# Altium PCB LEDMatrix.PcbDoc
Units mil, origin at the board's own origin, x right, y up, seen from the top; angles counter-clockwise.
Board outline 4925 x 2700 mil, 2 copper layers (Top Layer, Bottom Layer); 167 components, 176 nets, 355 pads, 150 vias.
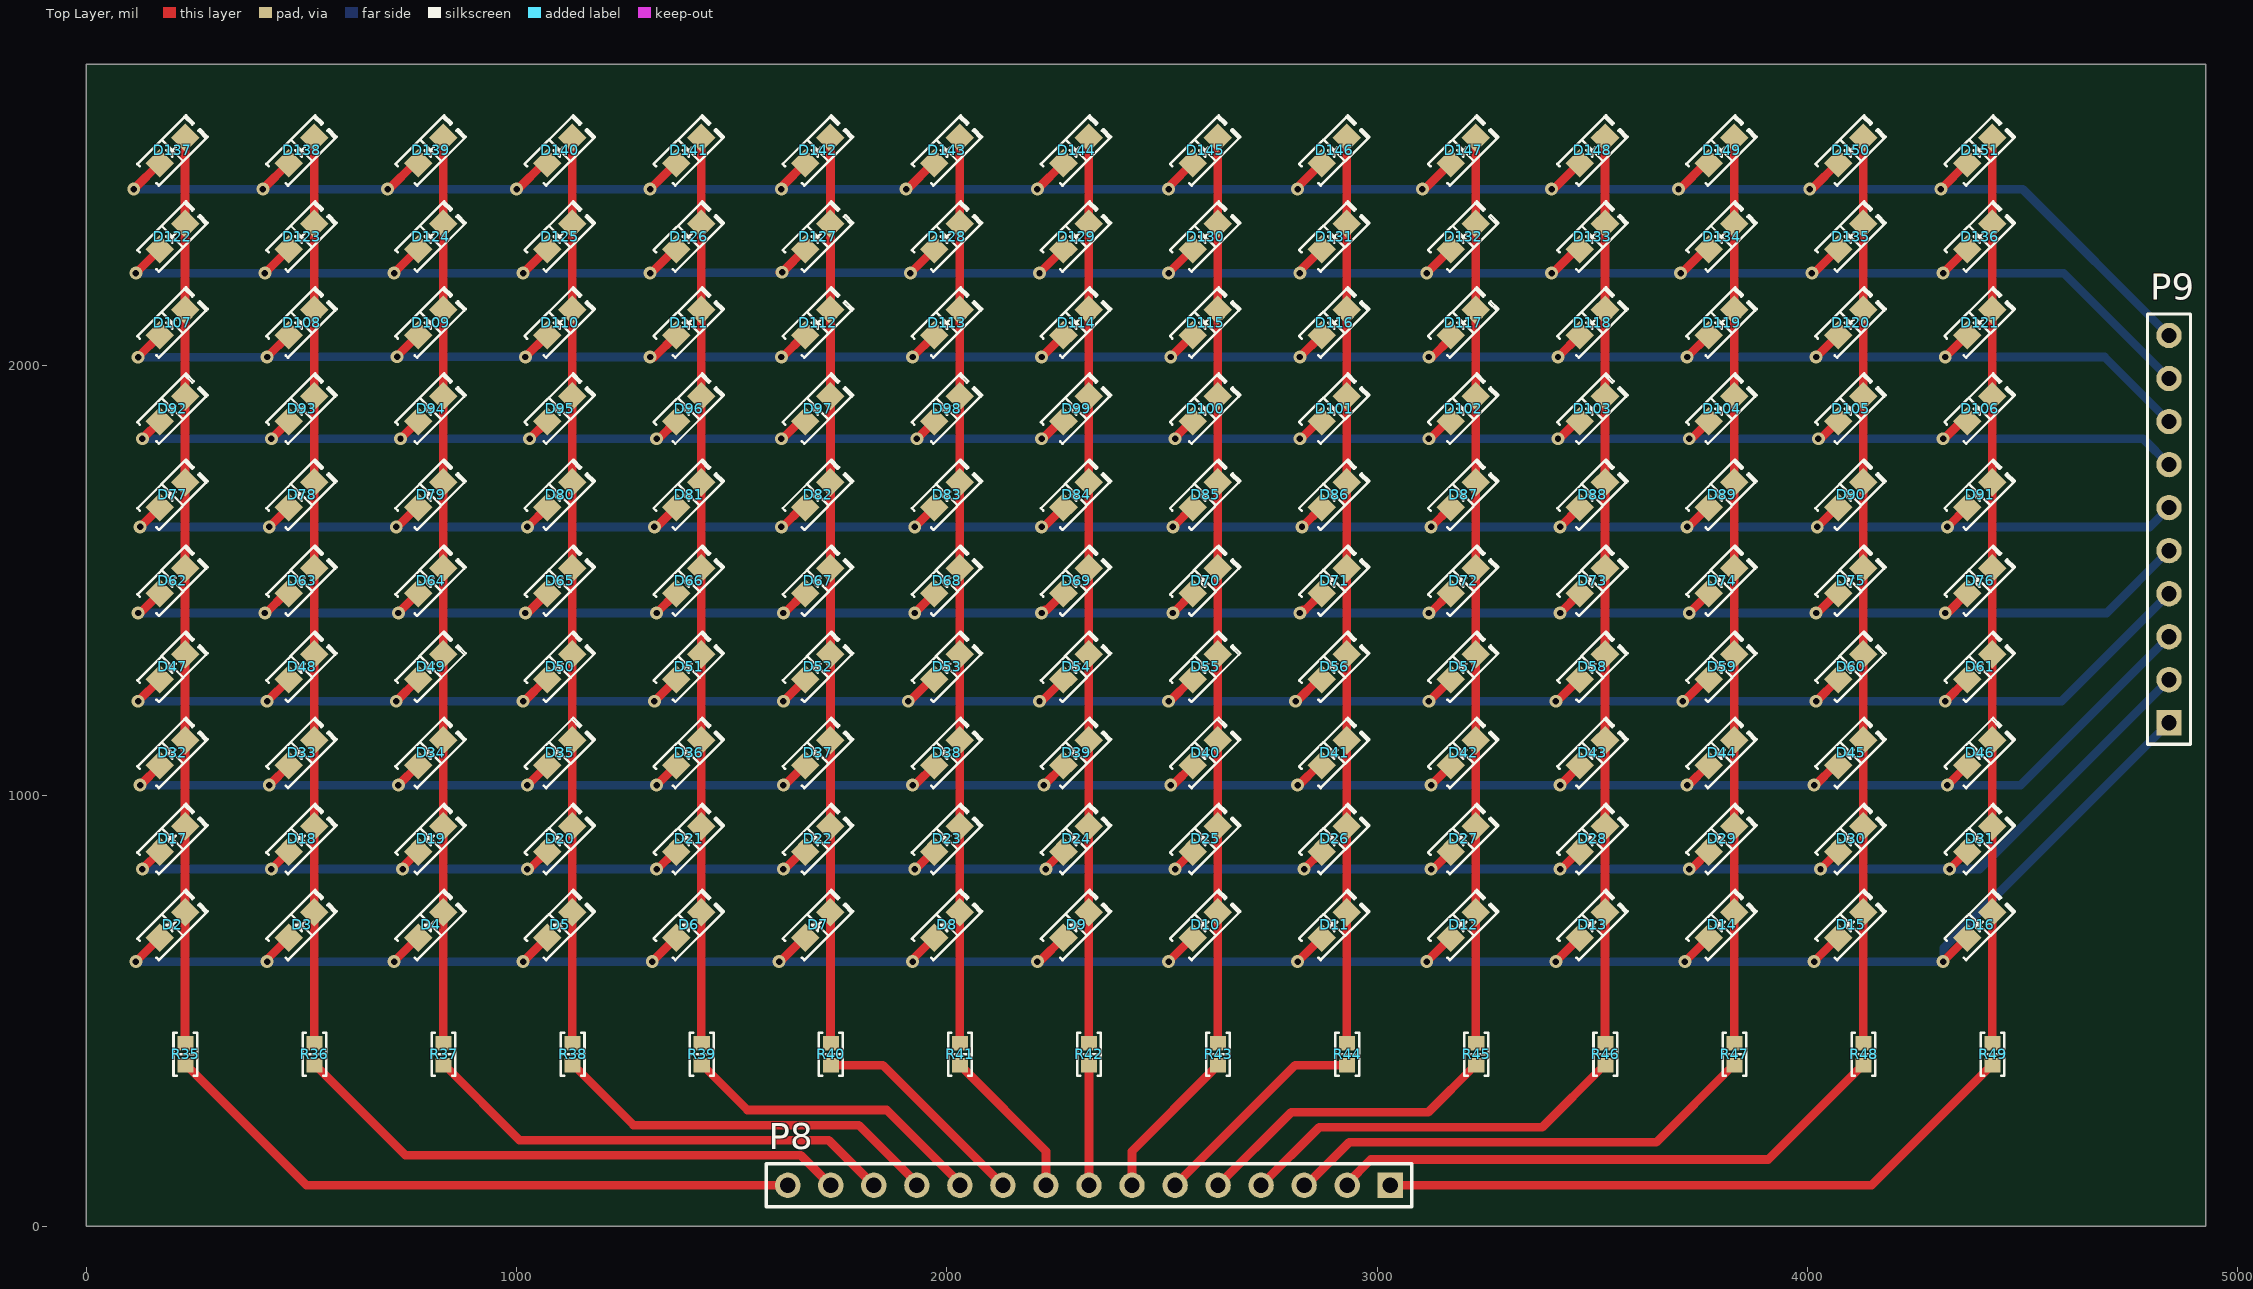
[diagram p0: Top Layer view]
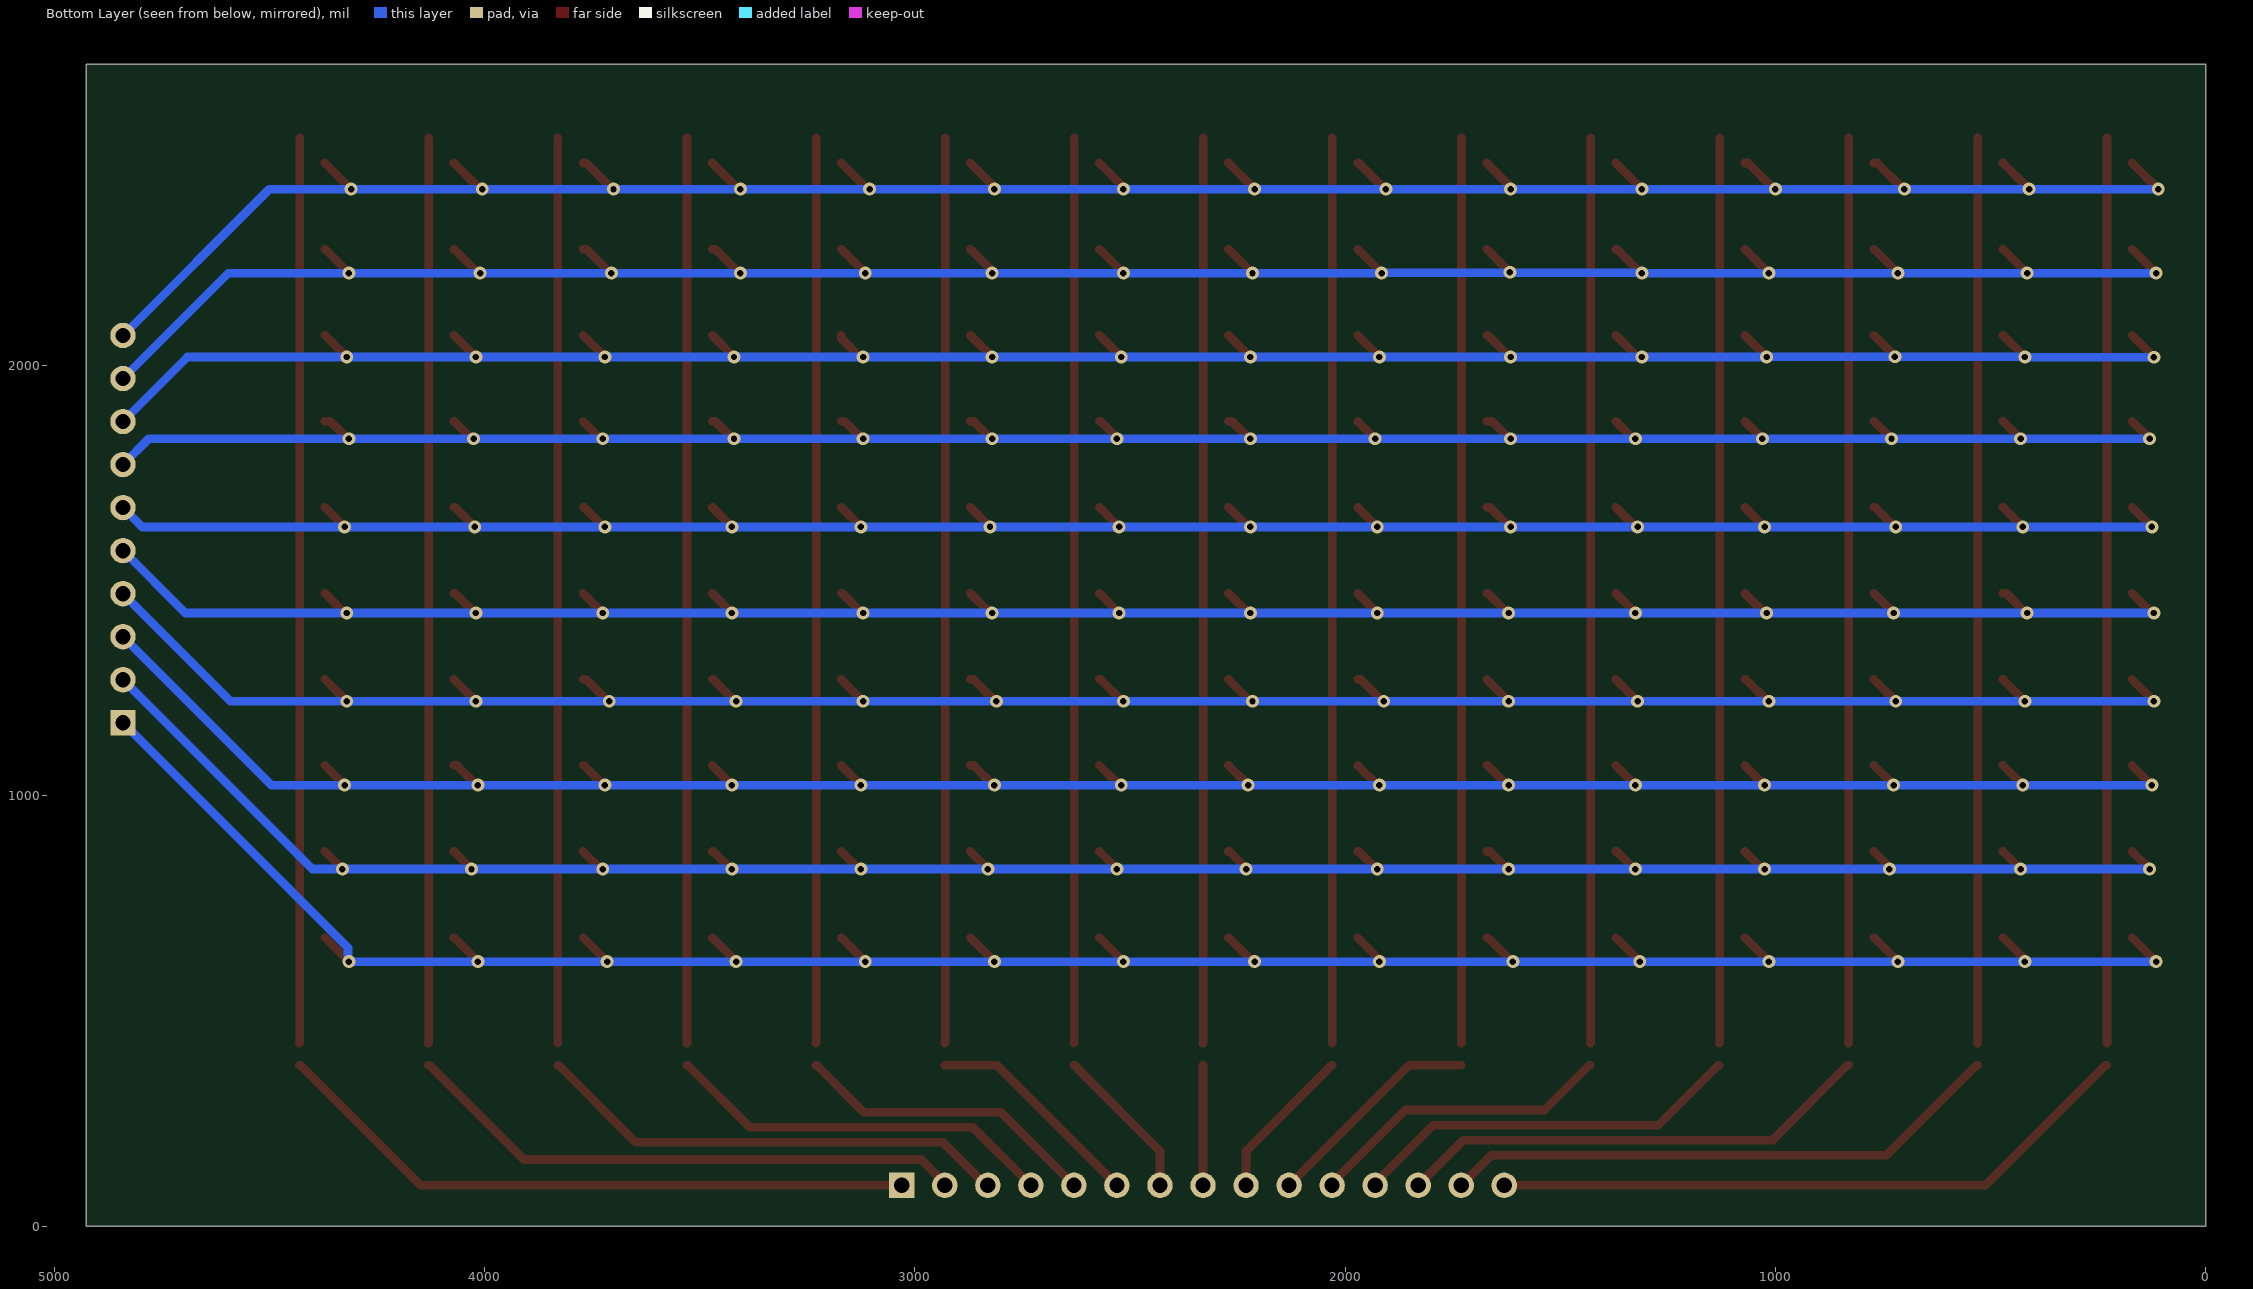
[diagram p1: Bottom Layer view, seen from below]
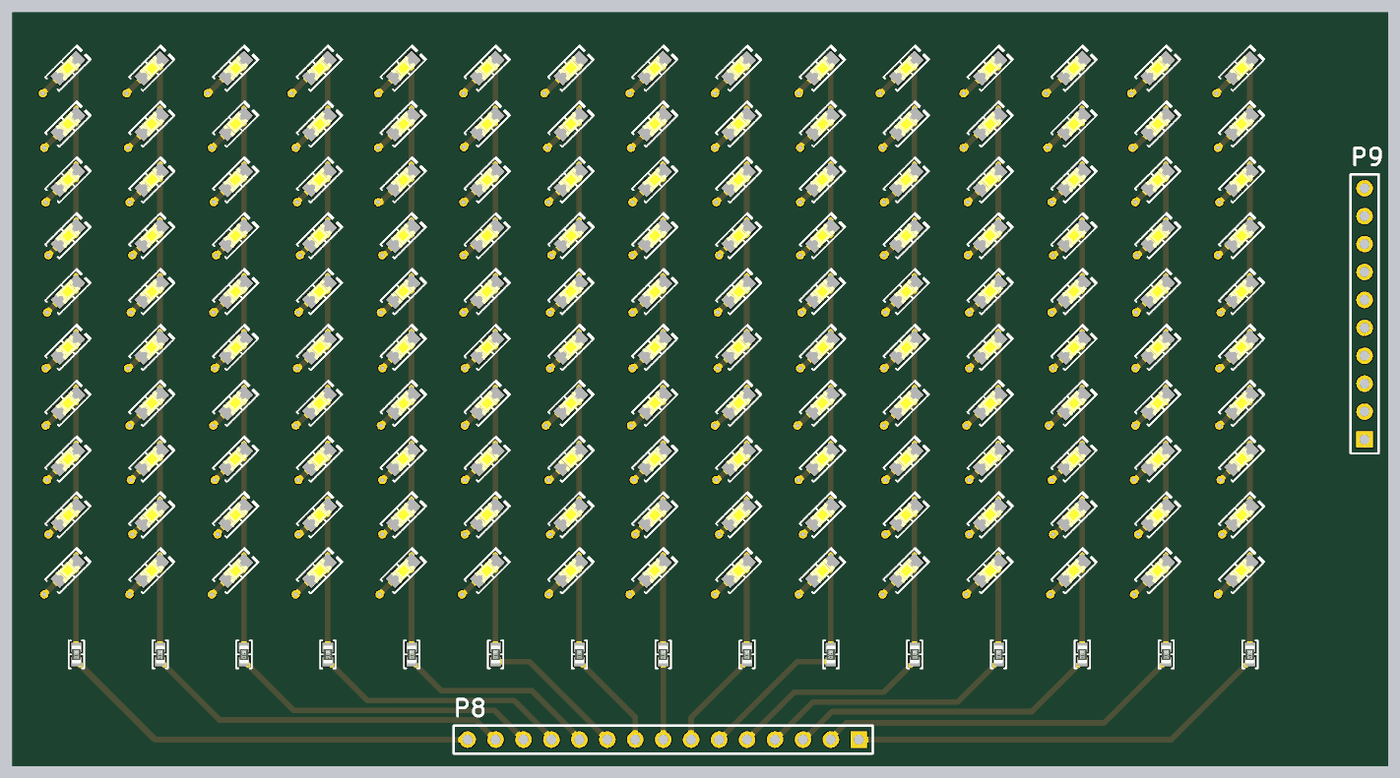
[diagram p2: 3D render of the assembled board from above, using the file's embedded part models]

## Layer stack, top to bottom
Top Solder: solder mask 0.4, Solder Resist, Dk 3.5
Top Layer: signal copper 1.4
Dielectric 1: dielectric 12.6, FR-4, Dk 4.8
Bottom Layer: signal copper 1.4
Bottom Solder: solder mask 0.4, Solder Resist, Dk 3.5

## Board outline
0,0 4925,0 4925,2700 0,2700

## Design rules (kind name [scope] priority, off if disabled: settings)
Clearance [All] p1: gap=10 ignorepadtopadclearanceinfootprint=FALSE except(0: Arc-Hole Track-Hole SMDPad-Hole THPad-Hole Via-Hole Fill-Hole Poly-Hole Region-Hole Text-Hole)
PolygonConnect [All] p1: connectstyle=Relief reliefconductorwidth=10 reliefentries=4 polygonreliefangle="90 Angle" airgapwidth=10
RoutingVias [All] p1: holewidth=15 width=30 viastyle="Through Hole" minholewidth=11 minwidth=20 maxholewidth=30 maxwidth=50
SolderMaskExpansion [All] p1: expansion=4 istentingtop=FALSE
Width [All] p1: maxlimit=50 minlimit=10 preferedwidth=20
30 further rules are at their usual default settings.

## Components (designator, comment, footprint, x,y, rotation, side; value= is the part's Value field where it differs from the comment)
D2 "Yellow" "LED 0805_2012 YELLOW" 200,700 r45 top
D3 "Yellow" "LED 0805_2012 YELLOW" 500,700 r45 top
D4 "Yellow" "LED 0805_2012 YELLOW" 800,700 r45 top
D5 "Yellow" "LED 0805_2012 YELLOW" 1100,700 r45 top
D6 "Yellow" "LED 0805_2012 YELLOW" 1400,700 r45 top
D7 "Yellow" "LED 0805_2012 YELLOW" 1700,700 r45 top
D8 "Yellow" "LED 0805_2012 YELLOW" 2000,700 r45 top
D9 "Yellow" "LED 0805_2012 YELLOW" 2300,700 r45 top
D10 "Yellow" "LED 0805_2012 YELLOW" 2600,700 r45 top
D11 "Yellow" "LED 0805_2012 YELLOW" 2900,700 r45 top
D12 "Yellow" "LED 0805_2012 YELLOW" 3200,700 r45 top
D13 "Yellow" "LED 0805_2012 YELLOW" 3500,700 r45 top
D14 "Yellow" "LED 0805_2012 YELLOW" 3800,700 r45 top
D15 "Yellow" "LED 0805_2012 YELLOW" 4100,700 r45 top
D16 "Yellow" "LED 0805_2012 YELLOW" 4400,700 r45 top
D17 "Yellow" "LED 0805_2012 YELLOW" 200,900 r45 top
D18 "Yellow" "LED 0805_2012 YELLOW" 500,900 r45 top
D19 "Yellow" "LED 0805_2012 YELLOW" 800,900 r45 top
D20 "Yellow" "LED 0805_2012 YELLOW" 1100,900 r45 top
D21 "Yellow" "LED 0805_2012 YELLOW" 1400,900 r45 top
D22 "Yellow" "LED 0805_2012 YELLOW" 1700,900 r45 top
D23 "Yellow" "LED 0805_2012 YELLOW" 2000,900 r45 top
D24 "Yellow" "LED 0805_2012 YELLOW" 2300,900 r45 top
D25 "Yellow" "LED 0805_2012 YELLOW" 2600,900 r45 top
D26 "Yellow" "LED 0805_2012 YELLOW" 2900,900 r45 top
D27 "Yellow" "LED 0805_2012 YELLOW" 3200,900 r45 top
D28 "Yellow" "LED 0805_2012 YELLOW" 3500,900 r45 top
D29 "Yellow" "LED 0805_2012 YELLOW" 3800,900 r45 top
D30 "Yellow" "LED 0805_2012 YELLOW" 4100,900 r45 top
D31 "Yellow" "LED 0805_2012 YELLOW" 4400,900 r45 top
D32 "Yellow" "LED 0805_2012 YELLOW" 200,1100 r45 top
D33 "Yellow" "LED 0805_2012 YELLOW" 500,1100 r45 top
D34 "Yellow" "LED 0805_2012 YELLOW" 800,1100 r45 top
D35 "Yellow" "LED 0805_2012 YELLOW" 1100,1100 r45 top
D36 "Yellow" "LED 0805_2012 YELLOW" 1400,1100 r45 top
D37 "Yellow" "LED 0805_2012 YELLOW" 1700,1100 r45 top
D38 "Yellow" "LED 0805_2012 YELLOW" 2000,1100 r45 top
D39 "Yellow" "LED 0805_2012 YELLOW" 2300,1100 r45 top
D40 "Yellow" "LED 0805_2012 YELLOW" 2600,1100 r45 top
D41 "Yellow" "LED 0805_2012 YELLOW" 2900,1100 r45 top
D42 "Yellow" "LED 0805_2012 YELLOW" 3200,1100 r45 top
D43 "Yellow" "LED 0805_2012 YELLOW" 3500,1100 r45 top
D44 "Yellow" "LED 0805_2012 YELLOW" 3800,1100 r45 top
D45 "Yellow" "LED 0805_2012 YELLOW" 4100,1100 r45 top
D46 "Yellow" "LED 0805_2012 YELLOW" 4400,1100 r45 top
D47 "Yellow" "LED 0805_2012 YELLOW" 200,1300 r45 top
D48 "Yellow" "LED 0805_2012 YELLOW" 500,1300 r45 top
D49 "Yellow" "LED 0805_2012 YELLOW" 800,1300 r45 top
D50 "Yellow" "LED 0805_2012 YELLOW" 1100,1300 r45 top
D51 "Yellow" "LED 0805_2012 YELLOW" 1400,1300 r45 top
D52 "Yellow" "LED 0805_2012 YELLOW" 1700,1300 r45 top
D53 "Yellow" "LED 0805_2012 YELLOW" 2000,1300 r45 top
D54 "Yellow" "LED 0805_2012 YELLOW" 2300,1300 r45 top
D55 "Yellow" "LED 0805_2012 YELLOW" 2600,1300 r45 top
D56 "Yellow" "LED 0805_2012 YELLOW" 2900,1300 r45 top
D57 "Yellow" "LED 0805_2012 YELLOW" 3200,1300 r45 top
D58 "Yellow" "LED 0805_2012 YELLOW" 3500,1300 r45 top
D59 "Yellow" "LED 0805_2012 YELLOW" 3800,1300 r45 top
D60 "Yellow" "LED 0805_2012 YELLOW" 4100,1300 r45 top
D61 "Yellow" "LED 0805_2012 YELLOW" 4400,1300 r45 top
D62 "Yellow" "LED 0805_2012 YELLOW" 200,1500 r45 top
D63 "Yellow" "LED 0805_2012 YELLOW" 500,1500 r45 top
D64 "Yellow" "LED 0805_2012 YELLOW" 800,1500 r45 top
D65 "Yellow" "LED 0805_2012 YELLOW" 1100,1500 r45 top
D66 "Yellow" "LED 0805_2012 YELLOW" 1400,1500 r45 top
D67 "Yellow" "LED 0805_2012 YELLOW" 1700,1500 r45 top
D68 "Yellow" "LED 0805_2012 YELLOW" 2000,1500 r45 top
D69 "Yellow" "LED 0805_2012 YELLOW" 2300,1500 r45 top
D70 "Yellow" "LED 0805_2012 YELLOW" 2600,1500 r45 top
D71 "Yellow" "LED 0805_2012 YELLOW" 2900,1500 r45 top
D72 "Yellow" "LED 0805_2012 YELLOW" 3200,1500 r45 top
D73 "Yellow" "LED 0805_2012 YELLOW" 3500,1500 r45 top
D74 "Yellow" "LED 0805_2012 YELLOW" 3800,1500 r45 top
D75 "Yellow" "LED 0805_2012 YELLOW" 4100,1500 r45 top
D76 "Yellow" "LED 0805_2012 YELLOW" 4400,1500 r45 top
D77 "Yellow" "LED 0805_2012 YELLOW" 200,1700 r45 top
D78 "Yellow" "LED 0805_2012 YELLOW" 500,1700 r45 top
D79 "Yellow" "LED 0805_2012 YELLOW" 800,1700 r45 top
D80 "Yellow" "LED 0805_2012 YELLOW" 1100,1700 r45 top
D81 "Yellow" "LED 0805_2012 YELLOW" 1400,1700 r45 top
D82 "Yellow" "LED 0805_2012 YELLOW" 1700,1700 r45 top
D83 "Yellow" "LED 0805_2012 YELLOW" 2000,1700 r45 top
D84 "Yellow" "LED 0805_2012 YELLOW" 2300,1700 r45 top
D85 "Yellow" "LED 0805_2012 YELLOW" 2600,1700 r45 top
D86 "Yellow" "LED 0805_2012 YELLOW" 2900,1700 r45 top
D87 "Yellow" "LED 0805_2012 YELLOW" 3200,1700 r45 top
D88 "Yellow" "LED 0805_2012 YELLOW" 3500,1700 r45 top
D89 "Yellow" "LED 0805_2012 YELLOW" 3800,1700 r45 top
D90 "Yellow" "LED 0805_2012 YELLOW" 4100,1700 r45 top
D91 "Yellow" "LED 0805_2012 YELLOW" 4400,1700 r45 top
D92 "Yellow" "LED 0805_2012 YELLOW" 200,1900 r45 top
D93 "Yellow" "LED 0805_2012 YELLOW" 500,1900 r45 top
D94 "Yellow" "LED 0805_2012 YELLOW" 800,1900 r45 top
D95 "Yellow" "LED 0805_2012 YELLOW" 1100,1900 r45 top
D96 "Yellow" "LED 0805_2012 YELLOW" 1400,1900 r45 top
D97 "Yellow" "LED 0805_2012 YELLOW" 1700,1900 r45 top
D98 "Yellow" "LED 0805_2012 YELLOW" 2000,1900 r45 top
D99 "Yellow" "LED 0805_2012 YELLOW" 2300,1900 r45 top
D100 "Yellow" "LED 0805_2012 YELLOW" 2600,1900 r45 top
D101 "Yellow" "LED 0805_2012 YELLOW" 2900,1900 r45 top
D102 "Yellow" "LED 0805_2012 YELLOW" 3200,1900 r45 top
D103 "Yellow" "LED 0805_2012 YELLOW" 3500,1900 r45 top
D104 "Yellow" "LED 0805_2012 YELLOW" 3800,1900 r45 top
D105 "Yellow" "LED 0805_2012 YELLOW" 4100,1900 r45 top
D106 "Yellow" "LED 0805_2012 YELLOW" 4400,1900 r45 top
D107 "Yellow" "LED 0805_2012 YELLOW" 200,2100 r45 top
D108 "Yellow" "LED 0805_2012 YELLOW" 500,2100 r45 top
D109 "Yellow" "LED 0805_2012 YELLOW" 800,2100 r45 top
D110 "Yellow" "LED 0805_2012 YELLOW" 1100,2100 r45 top
D111 "Yellow" "LED 0805_2012 YELLOW" 1400,2100 r45 top
D112 "Yellow" "LED 0805_2012 YELLOW" 1700,2100 r45 top
D113 "Yellow" "LED 0805_2012 YELLOW" 2000,2100 r45 top
D114 "Yellow" "LED 0805_2012 YELLOW" 2300,2100 r45 top
D115 "Yellow" "LED 0805_2012 YELLOW" 2600,2100 r45 top
D116 "Yellow" "LED 0805_2012 YELLOW" 2900,2100 r45 top
D117 "Yellow" "LED 0805_2012 YELLOW" 3200,2100 r45 top
D118 "Yellow" "LED 0805_2012 YELLOW" 3500,2100 r45 top
D119 "Yellow" "LED 0805_2012 YELLOW" 3800,2100 r45 top
D120 "Yellow" "LED 0805_2012 YELLOW" 4100,2100 r45 top
D121 "Yellow" "LED 0805_2012 YELLOW" 4400,2100 r45 top
D122 "Yellow" "LED 0805_2012 YELLOW" 200,2300 r45 top
D123 "Yellow" "LED 0805_2012 YELLOW" 500,2300 r45 top
D124 "Yellow" "LED 0805_2012 YELLOW" 800,2300 r45 top
D125 "Yellow" "LED 0805_2012 YELLOW" 1100,2300 r45 top
D126 "Yellow" "LED 0805_2012 YELLOW" 1400,2300 r45 top
D127 "Yellow" "LED 0805_2012 YELLOW" 1700,2300 r45 top
D128 "Yellow" "LED 0805_2012 YELLOW" 2000,2300 r45 top
D129 "Yellow" "LED 0805_2012 YELLOW" 2300,2300 r45 top
D130 "Yellow" "LED 0805_2012 YELLOW" 2600,2300 r45 top
D131 "Yellow" "LED 0805_2012 YELLOW" 2900,2300 r45 top
D132 "Yellow" "LED 0805_2012 YELLOW" 3200,2300 r45 top
D133 "Yellow" "LED 0805_2012 YELLOW" 3500,2300 r45 top
D134 "Yellow" "LED 0805_2012 YELLOW" 3800,2300 r45 top
D135 "Yellow" "LED 0805_2012 YELLOW" 4100,2300 r45 top
D136 "Yellow" "LED 0805_2012 YELLOW" 4400,2300 r45 top
D137 "Yellow" "LED 0805_2012 YELLOW" 200,2500 r45 top
D138 "Yellow" "LED 0805_2012 YELLOW" 500,2500 r45 top
D139 "Yellow" "LED 0805_2012 YELLOW" 800,2500 r45 top
D140 "Yellow" "LED 0805_2012 YELLOW" 1100,2500 r45 top
D141 "Yellow" "LED 0805_2012 YELLOW" 1400,2500 r45 top
D142 "Yellow" "LED 0805_2012 YELLOW" 1700,2500 r45 top
D143 "Yellow" "LED 0805_2012 YELLOW" 2000,2500 r45 top
D144 "Yellow" "LED 0805_2012 YELLOW" 2300,2500 r45 top
D145 "Yellow" "LED 0805_2012 YELLOW" 2600,2500 r45 top
D146 "Yellow" "LED 0805_2012 YELLOW" 2900,2500 r45 top
D147 "Yellow" "LED 0805_2012 YELLOW" 3200,2500 r45 top
D148 "Yellow" "LED 0805_2012 YELLOW" 3500,2500 r45 top
D149 "Yellow" "LED 0805_2012 YELLOW" 3800,2500 r45 top
D150 "Yellow" "LED 0805_2012 YELLOW" 4100,2500 r45 top
D151 "Yellow" "LED 0805_2012 YELLOW" 4400,2500 r45 top
P8 "Header 15" HDR1X15 3030,95 r180 top
P9 "Header 10" HDR1X10 4840,1170 r90 top
R35 "68 Ohms" "RES 0603_1608" 230,400 r270 top
R36 "68 Ohms" "RES 0603_1608" 530,400 r270 top
R37 "68 Ohms" "RES 0603_1608" 830,400 r270 top
R38 "68 Ohms" "RES 0603_1608" 1130,400 r270 top
R39 "68 Ohms" "RES 0603_1608" 1430,400 r270 top
R40 "68 Ohms" "RES 0603_1608" 1730,400 r270 top
R41 "68 Ohms" "RES 0603_1608" 2030,400 r270 top
R42 "68 Ohms" "RES 0603_1608" 2330,400 r270 top
R43 "68 Ohms" "RES 0603_1608" 2630,400 r270 top
R44 "68 Ohms" "RES 0603_1608" 2930,400 r270 top
R45 "68 Ohms" "RES 0603_1608" 3230,400 r270 top
R46 "68 Ohms" "RES 0603_1608" 3530,400 r270 top
R47 "68 Ohms" "RES 0603_1608" 3830,400 r270 top
R48 "68 Ohms" "RES 0603_1608" 4130,400 r270 top
R49 "68 Ohms" "RES 0603_1608" 4430,400 r270 top

## Footprints (in the part's own frame and the unit in brackets; to place one, negate y for a bottom-side part, rotate by r counter-clockwise, add the part's x,y. Pads: shape width x height; smd on the part's side, far side on the other; paste and mask are expansions set on the pad)
HDR1X10 [mm] "Connector; Header; 10 Position"
  rect 1.5x1.5 hole 0.9: 1(0,0)
  round 1.5 hole 0.9: 2(2.54,0) 3(5.08,0) 4(7.62,0) 5(10.16,0) 6(12.7,0) 7(15.24,0) 8(17.78,0) 9(20.32,0) 10(22.86,0)
  silkscreen extent -1.27,-1.27 24.13,1.27
HDR1X15 [mm] "Connector; Header; 15 Position"
  rect 1.5x1.5 hole 0.9: 1(0,0)
  round 1.5 hole 0.9: 2(2.54,0) 3(5.08,0) 4(7.62,0) 5(10.16,0) 6(12.7,0) 7(15.24,0) 8(17.78,0) 9(20.32,0) 10(22.86,0) 11(25.4,0) 12(27.94,0) 13(30.48,0) 14(33.02,0) 15(35.56,0)
  silkscreen extent -1.27,-1.27 36.83,1.27
"LED 0805_2012 YELLOW" [mm] "Chip Diode, 2-Leads, Body 2.00x1.25mm, IPC Medium Density"
  rect 1.2x1.2 smd: 1(-1.05,0) 2(1.05,0)
  silkscreen extent -2.03,-0.9 2.03,0.9, body extent -1,-0.62 1,0.63, height 0.9
"RES 0603_1608" [mm] "Chip Resistor, 2-Leads, Body 1.60x0.80mm, IPC Medium Density"
  rect 0.85x0.95 smd: 1(-0.65,0) 2(0.65,0)
  silkscreen extent -1.27,-0.7 1.27,0.7, body extent -0.8,-0.4 0.8,0.4, height 0.45

## Part data
D2 D3 D4 D5 D6 D7 D8 D9 D10 D11 D12 D13 D14 D15 D16 D17 D18 D19 D20 D21 D22 D23 D24 D25 D26 D27 D28 D29 D30 D31 D32 D33 D34 D35 D36 D37 D38 D39 D40 D41 D42 D43 D44 D45 D46 D47 D48 D49 D50 D51 D52 D53 D54 D55 D56 D57 D58 D59 D60 D61 D62 D63 D64 D65 D66 D67 D68 D69 D70 D71 D72 D73 D74 D75 D76 D77 D78 D79 D80 D81 D82 D83 D84 D85 D86 D87 D88 D89 D90 D91 D92 D93 D94 D95 D96 D97 D98 D99 D100 D101 D102 D103 D104 D105 D106 D107 D108 D109 D110 D111 D112 D113 D114 D115 D116 D117 D118 D119 D120 D121 D122 D123 D124 D125 D126 D127 D128 D129 D130 D131 D132 D133 D134 D135 D136 D137 D138 D139 D140 D141 D142 D143 D144 D145 D146 D147 D148 D149 D150 D151: library part SML-LX0805YC-TR, "LED YELLOW CLEAR SMD", Current - Test=20mA, Device Package="0805 (2012 Metric)", Lens Color=Colorless, Manufacturer="Lumex Opto/Components Inc.", Millicandela Rating=9mcd, Supplier Part Number 1=67-2192-1-ND, Voltage - Forward (Vf) (Typ)=2.1V, Color=Yellow, ComponentLink1Description=Datasheet, ComponentLink1URL=https://www.lumex.com/content/files/ProductAttachment/SML-LX0805YC-TR.pdf, ComponentLink2Description="DigiKey Link", ComponentLink2URL=http://digikey.com/product-detail/en/lumex-opto-components-inc/SML-LX0805YC-TR/67-2192-1-ND/4172836, Configuration=Standard, Height (Max)=1.20mm, LastUpdated="9/2/2020 1:21:22 AM", Lens Size="1.40mm x 1.25mm", Lens Style="Rectangle with Flat Top", Lens Transparency=Clear, Lifecycle Status=Active, Minimum Order=1, Mounting Type="Surface Mount", Package / Case="0805 (2012 Metric)", Packaging=TapeAndReel, Part Number=SML-LX0805YC-TR, Part Status=Active, PartId=39, Price=0.06, Series=-, Size / Dimension="2.00mm L x 1.25mm W", Supplier 1=DigiKey, Viewing Angle=140°, Wavelength - Peak=585nm
P8: "Header, 15-Pin", LatestRevisionDate=17-Jul-2002, LatestRevisionNote="Re-released for DXP Platform.", Publisher="Altium Limited"
P9: "Header, 10-Pin", LatestRevisionDate=17-Jul-2002, LatestRevisionNote="Re-released for DXP Platform.", Publisher="Altium Limited"
R35 R36 R37 R38 R39 R40 R41 R42 R43 R44 R45 R46 R47 R48 R49: library part CRGCQ0603J68R, "CRGCQ 0603 68R 5%", Device Package="0603 (1608 Metric)", Manufacturer="TE Connectivity Passive Product", Operating Temperature="-55°C ~ 155°C", Power (Watts)="0.1W, 1/10W", Ratings=AEC-Q200, Supplier Device Package=0603, Supplier Part Number 1=A130084CT-ND, Temperature Coefficient=±200ppm/°C, Tolerance=±5%, ComponentLink1Description=Datasheet, ComponentLink1URL=https://www.te.com/commerce/DocumentDelivery/DDEController?Action=srchrtrv&DocNm=1773204-3&DocType=DS&DocLang=English, ComponentLink2Description="DigiKey Link", ComponentLink2URL=http://digikey.com/product-detail/en/te-connectivity-passive-product/CRGCQ0603J68R/A130084CT-ND/8577916, Composition="Thick Film", Features="Automotive AEC-Q200, Moisture Resistant", Height - Seated (Max)="0.022\" (0.55mm)", LastUpdated="9/2/2020 1:10:07 AM", Lifecycle Status=Active, Minimum Order=1, Number of Terminations=2, Package / Case="0603 (1608 Metric)", Packaging=CutTape, Part Number=CRGCQ0603J68R, Part Status=Active, PartId=13186, Price=0.10, Resistance="68 Ohms", Series=CRGCQ, Size / Dimension="0.063\" L x 0.031\" W (1.60mm x 0.80mm)", Supplier 1=DigiKey

## Via types
v1: diameter 30, hole 15, Top Layer to Bottom Layer, 150 vias

## Nets (pads, with @x,y where several pads share a name; then routed paths per layer and width w, separated by ;. In a path a pad name is that pad's centre, name@x,y a point inside that pad or via, vN(x,y) a via of type N, cw(c..) or ccw(c..) an arc to the next point about the centre after c; other vN are vias at no path point)
GND: 
Net*_3: 
Net*_4: 
NetC1_2: 
NetC11_2: 
NetC12_2: 
NetC13_2: 
NetC14_2: 
NetC15_2: 
NetC20_2: 
NetC34_1: 
NetD1_1: 
NetD2_1: D2.1 D3.1 D4.1 D5.1 D6.1 D7.1 D8.1 D9.1 D10.1 D11.1 D12.1 D13.1 D14.1 D15.1 D16.1 P9.1 | length 6161.4
  Top Layer w20: v1(115,615) D2.1 ; v1(420,615) 420,620 D3.1 ; v1(715,615) D4.1 ; v1(1015,615) D5.1 ; v1(1315,615) D6.1 ; v1(1610,615) 1612.5,615 1668.27,670.77 D7.1 ; v1(1920,615) 1921.91,616.91 1921.91,621.91 D8.1 ; v1(2210,615) 2211.91,616.91 2216.91,616.91 D9.1 ; v1(2515,615) D10.1 ; v1(2815,615) D11.1 ; v1(3115,615) D12.1 ; v1(3415,615) D13.1 ; v1(3715,615) D14.1 ; v1(4015,615) D15.1 ; v1(4315,615) D16.1
  Bottom Layer w20: v1(115,615) v1(420,615) v1(715,615) v1(1015,615) v1(1315,615) v1(1610,615) v1(1920,615) v1(2210,615) v1(2515,615) v1(2815,615) v1(3115,615) v1(3415,615) v1(3715,615) v1(4015,615) v1(4315,615) 4316.91,616.91 4316.91,646.91 P9.1
NetD2_2: D2.2 D17.2 D32.2 D47.2 D62.2 D77.2 D92.2 D107.2 D122.2 D137.2 R35.1 | length 2104
  Top Layer w20: D137.2 D122.2 D107.2 D92.2 D77.2 D62.2 D47.2 D32.2 D17.2 D2.2 229.23,426.36 R35.1
NetD3_2: D3.2 D18.2 D33.2 D48.2 D63.2 D78.2 D93.2 D108.2 D123.2 D138.2 R36.1 | length 2104
  Top Layer w20: D138.2 D123.2 D108.2 D93.2 D78.2 D63.2 D48.2 D33.2 D18.2 D3.2 529.23,426.36 R36.1
NetD4_2: D4.2 D19.2 D34.2 D49.2 D64.2 D79.2 D94.2 D109.2 D124.2 D139.2 R37.1 | length 2104
  Top Layer w20: D139.2 D124.2 D109.2 D94.2 D79.2 D64.2 D49.2 D34.2 D19.2 D4.2 829.23,426.36 R37.1
NetD5_2: D5.2 D20.2 D35.2 D50.2 D65.2 D80.2 D95.2 D110.2 D125.2 D140.2 R38.1 | length 2104
  Top Layer w20: D140.2 D125.2 D110.2 D95.2 D80.2 D65.2 D50.2 D35.2 D20.2 D5.2 1129.23,426.36 R38.1
NetD6_2: D6.2 D21.2 D36.2 D51.2 D66.2 D81.2 D96.2 D111.2 D126.2 D141.2 R39.1 | length 2104
  Top Layer w20: D141.2 D126.2 D111.2 D96.2 D81.2 D66.2 D51.2 D36.2 D21.2 D6.2 1429.23,426.36 R39.1
NetD7_2: D7.2 D22.2 D37.2 D52.2 D67.2 D82.2 D97.2 D112.2 D127.2 D142.2 R40.1 | length 2104
  Top Layer w20: D142.2 D127.2 D112.2 D97.2 D82.2 D67.2 D52.2 D37.2 D22.2 D7.2 1729.23,426.36 R40.1
NetD8_2: D8.2 D23.2 D38.2 D53.2 D68.2 D83.2 D98.2 D113.2 D128.2 D143.2 R41.1 | length 2104
  Top Layer w20: D143.2 D128.2 D113.2 D98.2 D83.2 D68.2 D53.2 D38.2 D23.2 D8.2 2029.23,426.36 R41.1
NetD9_2: D9.2 D24.2 D39.2 D54.2 D69.2 D84.2 D99.2 D114.2 D129.2 D144.2 R42.1 | length 2104
  Top Layer w20: D144.2 D129.2 D114.2 D99.2 D84.2 D69.2 D54.2 D39.2 D24.2 D9.2 2329.23,426.36 R42.1
NetD10_2: D10.2 D25.2 D40.2 D55.2 D70.2 D85.2 D100.2 D115.2 D130.2 D145.2 R43.1 | length 2104
  Top Layer w20: D145.2 D130.2 D115.2 D100.2 D85.2 D70.2 D55.2 D40.2 D25.2 D10.2 2629.23,426.36 R43.1
NetD11_2: D11.2 D26.2 D41.2 D56.2 D71.2 D86.2 D101.2 D116.2 D131.2 D146.2 R44.1 | length 2104
  Top Layer w20: D146.2 D131.2 D116.2 D101.2 D86.2 D71.2 D56.2 D41.2 D26.2 D11.2 2929.23,426.36 R44.1
NetD12_2: D12.2 D27.2 D42.2 D57.2 D72.2 D87.2 D102.2 D117.2 D132.2 D147.2 R45.1 | length 2104
  Top Layer w20: D147.2 D132.2 D117.2 D102.2 D87.2 D72.2 D57.2 D42.2 D27.2 D12.2 3229.23,426.36 R45.1
NetD13_2: D13.2 D28.2 D43.2 D58.2 D73.2 D88.2 D103.2 D118.2 D133.2 D148.2 R46.1 | length 2104
  Top Layer w20: D148.2 D133.2 D118.2 D103.2 D88.2 D73.2 D58.2 D43.2 D28.2 D13.2 3529.23,426.36 R46.1
NetD14_2: D14.2 D29.2 D44.2 D59.2 D74.2 D89.2 D104.2 D119.2 D134.2 D149.2 R47.1 | length 2104
  Top Layer w20: D149.2 D134.2 D119.2 D104.2 D89.2 D74.2 D59.2 D44.2 D29.2 D14.2 3829.23,426.36 R47.1
NetD15_2: D15.2 D30.2 D45.2 D60.2 D75.2 D90.2 D105.2 D120.2 D135.2 D150.2 R48.1 | length 2104
  Top Layer w20: D150.2 D135.2 D120.2 D105.2 D90.2 D75.2 D60.2 D45.2 D30.2 D15.2 4129.23,426.36 R48.1
NetD16_2: D16.2 D31.2 D46.2 D61.2 D76.2 D91.2 D106.2 D121.2 D136.2 D151.2 R49.1 | length 2104
  Top Layer w20: D151.2 D136.2 D121.2 D106.2 D91.2 D76.2 D61.2 D46.2 D31.2 D16.2 4429.23,426.36 R49.1
NetD17_1: D17.1 D18.1 D19.1 D20.1 D21.1 D22.1 D23.1 D24.1 D25.1 D26.1 D27.1 D28.1 D29.1 D30.1 D31.1 P9.2 | length 5796.5
  Top Layer w20: v1(130,830) D17.1 ; v1(430,830) D18.1 ; v1(735,830) 735,835 D19.1 ; v1(1025,830) 1030,830 D20.1 ; v1(1325,830) 1327.5,830 1368.27,870.77 D21.1 ; v1(1620,830) 1622.71,830 1663.48,870.77 D22.1 ; v1(1925,830) 1927.5,830 1968.27,870.77 D23.1 ; v1(2230,830) 2230,832.5 2268.27,870.77 D24.1 ; v1(2530,830) D25.1 ; v1(2830,830) D26.1 ; v1(3125,830) 3126.91,831.91 3131.91,831.91 D27.1 ; v1(3425,830) 3427.5,830 3468.27,870.77 D28.1 ; v1(3725,830) 3726.91,831.91 3731.91,831.91 D29.1 ; v1(4030,830) D30.1 ; v1(4330,830) D31.1
  Bottom Layer w20: v1(130,830) v1(430,830) v1(735,830) v1(1025,830) v1(1325,830) v1(1620,830) v1(1925,830) v1(2230,830) v1(2530,830) v1(2830,830) v1(3125,830) v1(3425,830) v1(3725,830) v1(4030,830) v1(4330,830) 4400,830 P9.2
NetD32_1: D32.1 D33.1 D34.1 D35.1 D36.1 D37.1 D38.1 D39.1 D40.1 D41.1 D42.1 D43.1 D44.1 D45.1 D46.1 P9.3 | length 5868.8
  Top Layer w20: v1(125,1025) D32.1 ; v1(425,1025) D33.1 ; v1(725,1025) D34.1 ; v1(1025,1025) D35.1 ; v1(1325,1025) D36.1 ; v1(1620,1025) 1622.5,1025 1668.27,1070.77 D37.1 ; v1(1920,1025) 1921.91,1026.91 1926.91,1026.91 D38.1 ; v1(2225,1025) D39.1 ; v1(2520,1025) 2521.91,1026.91 2526.91,1026.91 D40.1 ; v1(2815,1025) 2817.71,1025 2863.48,1070.77 D41.1 ; v1(3125,1025) D42.1 ; v1(3425,1025) D43.1 ; v1(3720,1025) 3722.5,1025 3768.27,1070.77 D44.1 ; v1(4015,1025) 4017.71,1025 4063.48,1070.77 D45.1 ; v1(4325,1025) D46.1
  Bottom Layer w20: v1(125,1025) v1(425,1025) v1(725,1025) v1(1025,1025) v1(1325,1025) v1(1620,1025) v1(1920,1025) v1(2225,1025) v1(2520,1025) v1(2815,1025) v1(3125,1025) v1(3425,1025) v1(3720,1025) v1(4015,1025) v1(4325,1025) 4495,1025 P9.3
NetD47_1: D47.1 D48.1 D49.1 D50.1 D51.1 D52.1 D53.1 D54.1 D55.1 D56.1 D57.1 D58.1 D59.1 D60.1 D61.1 P9.4 | length 5950.5
  Top Layer w20: v1(120,1220) D47.1 ; v1(420,1220) D48.1 ; v1(720,1220) D49.1 ; v1(1015,1220) 1017.5,1220 1068.27,1270.77 D50.1 ; v1(1320,1220) D51.1 ; v1(1620,1220) D52.1 ; v1(1910,1220) 1912.71,1220 1963.48,1270.77 D53.1 ; v1(2215,1220) 2216.91,1221.91 2221.91,1221.91 D54.1 ; v1(2515,1220) 2517.5,1220 2568.27,1270.77 D55.1 ; v1(2810,1220) 2812.71,1220 2863.48,1270.77 D56.1 ; v1(3120,1220) D57.1 ; v1(3415,1220) 3417.5,1220 3468.27,1270.77 D58.1 ; v1(3710,1220) 3712.71,1220 3763.48,1270.77 D59.1 ; v1(4020,1220) D60.1 ; v1(4320,1220) D61.1
  Bottom Layer w20: v1(120,1220) v1(420,1220) v1(720,1220) v1(1015,1220) v1(1320,1220) v1(1620,1220) v1(1910,1220) v1(2215,1220) v1(2515,1220) v1(2810,1220) v1(3120,1220) v1(3415,1220) v1(3710,1220) v1(4020,1220) v1(4320,1220) 4590,1220 P9.4
NetD62_1: D62.1 D63.1 D64.1 D65.1 D66.1 D67.1 D68.1 D69.1 D70.1 D71.1 D72.1 D73.1 D74.1 D75.1 D76.1 P9.5 | length 5801
  Top Layer w20: v1(120,1425) 121.91,1426.91 126.91,1426.91 D62.1 ; v1(415,1425) 417.71,1425 463.48,1470.77 D63.1 ; v1(725,1425) D64.1 ; v1(1020,1425) 1021.91,1426.91 1026.91,1426.91 D65.1 ; v1(1325,1425) D66.1 ; v1(1620,1425) 1622.5,1425 1668.27,1470.77 D67.1 ; v1(1925,1425) D68.1 ; v1(2220,1425) 2226.91,1431.91 2231.91,1431.91 D69.1 ; v1(2525,1425) D70.1 ; v1(2820,1425) 2826.91,1431.91 2831.91,1431.91 D71.1 ; v1(3120,1425) 3122.5,1425 3168.27,1470.77 D72.1 ; v1(3425,1425) D73.1 ; v1(3725,1425) D74.1 ; v1(4020,1425) 4022.5,1425 4068.27,1470.77 D75.1 ; v1(4320,1425) 4321.91,1426.91 4326.91,1426.91 D76.1
  Bottom Layer w20: v1(120,1425) v1(415,1425) v1(725,1425) v1(1020,1425) v1(1325,1425) v1(1620,1425) v1(1925,1425) v1(2220,1425) v1(2525,1425) v1(2820,1425) v1(3120,1425) v1(3425,1425) v1(3725,1425) v1(4020,1425) v1(4320,1425) 4695,1425 P9.5
NetD77_1: D77.1 D78.1 D79.1 D80.1 D81.1 D82.1 D83.1 D84.1 D85.1 D86.1 D87.1 D88.1 D89.1 D90.1 D91.1 P9.6 | length 5737.1
  Top Layer w20: v1(125,1625) D77.1 ; v1(425,1625) D78.1 ; v1(720,1625) 722.5,1625 768.27,1670.77 D79.1 ; v1(1025,1625) D80.1 ; v1(1320,1625) 1321.91,1626.91 1326.91,1626.91 D81.1 ; v1(1615,1625) 1617.71,1625 1663.48,1670.77 D82.1 ; v1(1925,1625) D83.1 ; v1(2220,1625) 2221.91,1626.91 2226.91,1626.91 D84.1 ; v1(2525,1625) D85.1 ; v1(2825,1625) D86.1 ; v1(3125,1625) D87.1 ; v1(3425,1625) D88.1 ; v1(3720,1625) 3722.5,1625 3768.27,1670.77 D89.1 ; v1(4022.5,1625) 4068.27,1670.77 D90.1 ; v1(4325,1625) D91.1
  Bottom Layer w20: v1(125,1625) v1(425,1625) v1(720,1625) v1(1025,1625) v1(1320,1625) v1(1615,1625) v1(1925,1625) v1(2220,1625) v1(2525,1625) v1(2825,1625) v1(3125,1625) v1(3425,1625) v1(3720,1625) v1(4022.5,1625) v1(4325,1625) 4795,1625 P9.6
NetD92_1: D92.1 D93.1 D94.1 D95.1 D96.1 D97.1 D98.1 D99.1 D100.1 D101.1 D102.1 D103.1 D104.1 D105.1 D106.1 P9.7 | length 5686.2
  Top Layer w20: v1(130,1830) D92.1 ; v1(430,1830) D93.1 ; v1(730,1830) D94.1 ; v1(1030,1830) D95.1 ; v1(1325,1830) 1326.91,1831.91 1331.91,1831.91 D96.1 ; v1(1615,1830) 1617.71,1830 1658.48,1870.77 D97.1 ; v1(1930,1830) D98.1 ; v1(2220,1830) 2222.71,1830 2263.48,1870.77 D99.1 ; v1(2530,1830) 2530,1832.5 2568.27,1870.77 D100.1 ; v1(2820,1830) 2822.71,1830 2863.48,1870.77 D101.1 ; v1(3120,1830) 3122.71,1830 3163.48,1870.77 D102.1 ; v1(3420,1830) 3422.71,1830 3463.48,1870.77 D103.1 ; v1(3725,1830) 3726.91,1831.91 3731.91,1831.91 D104.1 ; v1(4025,1830) 4026.91,1831.91 4031.91,1831.91 D105.1 ; v1(4315,1830) 4317.71,1830 4358.48,1870.77 D106.1
  Bottom Layer w20: v1(130,1830) v1(430,1830) v1(730,1830) v1(1030,1830) v1(1325,1830) v1(1615,1830) v1(1930,1830) v1(2220,1830) v1(2530,1830) v1(2820,1830) v1(3120,1830) v1(3420,1830) v1(3725,1830) v1(4025,1830) v1(4315,1830) 4780,1830 P9.7
NetD107_1: D107.1 D108.1 D109.1 D110.1 D111.1 D112.1 D113.1 D114.1 D115.1 D116.1 D117.1 D118.1 D119.1 D120.1 D121.1 P9.8 | length 5878.4
  Top Layer w20: v1(120,2019.38) 120,2020 D107.1 ; v1(420,2020) D108.1 ; v1(721.91,2020.66) 721.91,2021.91 D109.1 ; v1(1020,2020) D110.1 ; v1(1310,2020) 1320,2020 D111.1 ; v1(1615,2020) 1617.5,2020 1668.27,2070.77 D112.1 ; v1(1920,2020) D113.1 ; v1(2220,2020) D114.1 ; v1(2520,2020) D115.1 ; v1(2820,2020) D116.1 ; v1(3120,2020) 3127.29,2020 3170.77,2063.48 D117.1 ; v1(3420,2020) D118.1 ; v1(3720,2020) D119.1 ; v1(4020,2020) D120.1 ; v1(4320,2020) D121.1
  Bottom Layer w20: v1(120,2019.38) 120.31,2019.69 419.69,2019.69 v1(420,2020) 420.33,2020.33 721.58,2020.33 v1(721.91,2020.66) 722.24,2020.33 1019.67,2020.33 v1(1020,2020) v1(1310,2020) v1(1615,2020) v1(1920,2020) v1(2220,2020) v1(2520,2020) v1(2820,2020) v1(3120,2020) v1(3420,2020) v1(3720,2020) v1(4020,2020) v1(4320,2020) 4690,2020 P9.8
NetD122_1: D122.1 D123.1 D124.1 D125.1 D126.1 D127.1 D128.1 D129.1 D130.1 D131.1 D132.1 D133.1 D134.1 D135.1 D136.1 P9.9 | length 6041.3
  Top Layer w20: v1(115,2215) D122.1 ; v1(415,2215) D123.1 ; v1(715,2215) D124.1 ; v1(1015,2215) D125.1 ; v1(1310,2215) 1312.5,2215 1368.27,2270.77 D126.1 ; v1@1611.91,2216.91 v1(1616.91,2216.91) D127.1 ; v1(1915,2215) D128.1 ; v1(2215,2215) D129.1 ; v1(2515,2215) D130.1 ; v1(2820,2215) 2821.91,2216.91 2821.91,2221.91 D131.1 ; v1(3115,2215) D132.1 ; v1(3405,2215) 3407.71,2215 3463.48,2270.77 D133.1 ; v1(3705,2215) 3707.71,2215 3763.48,2270.77 D134.1 ; v1(4010,2215) 4015,2215 D135.1 ; v1(4315,2215) D136.1
  Bottom Layer w20: v1(115,2215) v1(415,2215) v1(715,2215) v1(1015,2215) v1(1310,2215) 1310.96,2215.96 1615.96,2215.96 v1(1616.91,2216.91) 1617.87,2215.96 1914.04,2215.96 v1(1915,2215) v1(2215,2215) v1(2515,2215) v1(2820,2215) v1(3115,2215) v1(3405,2215) v1(3705,2215) v1(4010,2215) v1(4315,2215) 4595,2215 P9.9
NetD137_1: D137.1 D138.1 D139.1 D140.1 D141.1 D142.1 D143.1 D144.1 D145.1 D146.1 D147.1 D148.1 D149.1 D150.1 D151.1 P9.10 | length 6203.7
  Top Layer w20: v1(110,2410) D137.1 ; v1(410,2410) D138.1 ; v1(700,2410) 702.71,2410 763.48,2470.77 D139.1 ; v1(1000,2410) 1002.71,2410 1063.48,2470.77 D140.1 ; v1(1310,2410) D141.1 ; v1(1615,2410) 1616.91,2411.91 1616.91,2416.91 D142.1 ; v1(1905,2410) 1907.5,2410 1968.27,2470.77 D143.1 ; v1(2210,2410) D144.1 ; v1(2515,2410) 2516.91,2411.91 2516.91,2416.91 D145.1 ; v1(2815,2410) 2816.91,2411.91 2816.91,2416.91 D146.1 ; v1(3105,2410) 3106.91,2411.91 3111.91,2411.91 D147.1 ; v1(3405,2410) 3406.91,2411.91 3411.91,2411.91 D148.1 ; v1(3700,2410) 3702.71,2410 3763.48,2470.77 D149.1 ; v1(4005,2410) 4006.91,2411.91 4011.91,2411.91 D150.1 ; v1(4310,2410) D151.1
  Bottom Layer w20: v1(110,2410) v1(410,2410) v1(700,2410) v1(1000,2410) v1(1310,2410) v1(1615,2410) v1(1905,2410) v1(2210,2410) v1(2515,2410) v1(2815,2410) v1(3105,2410) v1(3405,2410) v1(3700,2410) v1(4005,2410) v1(4310,2410) 4500,2410 P9.10
NetJ1_2: 
NetJ1_3: 
NetP1_1: 
NetP1_2: 
NetP1_3: 
NetP1_4: 
NetP1_5: 
NetP1_6: 
NetP1_7: 
NetP1_8: 
NetP1_9: 
NetP1_10: 
NetP1_11: 
NetP1_12: 
NetP1_13: 
NetP2_1: 
NetP2_2: 
NetP2_3: 
NetP2_4: 
NetP2_5: 
NetP2_6: 
NetP2_7: 
NetP2_8: 
NetP2_9: 
NetP2_10: 
NetP3_1: 
NetP3_2: 
NetP3_3: 
NetP3_4: 
NetP3_5: 
NetP3_6: 
NetP3_7: 
NetP3_8: 
NetP3_9: 
NetP3_10: 
NetP4_1: 
NetP4_2: 
NetP4_3: 
NetP4_4: 
NetP4_5: 
NetP4_6: 
NetP4_7: 
NetP4_8: 
NetP4_9: 
NetP4_10: 
NetP4_11: 
NetP4_12: 
NetP4_13: 
NetP4_14: 
NetP4_15: 
NetP4_16: 
NetP5_1: 
NetP5_2: 
NetP5_3: 
NetP5_4: 
NetP5_5: 
NetP5_6: 
NetP5_7: 
NetP5_8: 
NetP5_9: 
NetP5_10: 
NetP6_1: 
NetP6_2: 
NetP6_3: 
NetP6_4: 
NetP6_5: 
NetP6_6: 
NetP6_7: 
NetP6_8: 
NetP6_9: 
NetP6_10: 
NetP6_11: 
NetP6_12: 
NetP6_13: 
NetP6_14: 
NetP6_15: 
NetP7_1: 
NetP7_2: 
NetP7_3: 
NetP7_4: 
NetP7_5: 
NetP7_6: 
NetP7_7: 
NetP7_8: 
NetP7_9: 
NetP7_10: 
NetP8_1: P8.1 R49.2 | length 1515.7
  Top Layer w20: P8.1 4148.62,95 4428.03,374.41 R49.2
NetP8_2: P8.2 R48.2 | length 1318.7
  Top Layer w20: P8.2 2930,100 2985,155 3908.62,155 4128.03,374.41 R48.2
NetP8_3: P8.3 R47.2 | length 1115.7
  Top Layer w20: P8.3 2835,95 2935,195 3648.62,195 3828.03,374.41 R47.2
NetP8_4: P8.4 R46.2 | length 915.7
  Top Layer w20: P8.4 2865,230 3383.62,230 3528.03,374.41 R46.2
NetP8_5: P8.5 R45.2 | length 715.7
  Top Layer w20: P8.5 2800,265 3118.62,265 3228.03,374.41 R45.2
NetP8_6: P8.6 R44.2 | length 515.7
  Top Layer w20: P8.6 2809.41,374.41 R44.2
NetP8_7: P8.7 R43.2 | length 363.4
  Top Layer w20: P8.7 2430,174.41 2621.3,365.71 2621.3,367.68 2628.03,374.41 R43.2
NetP8_8: P8.8 R42.2 | length 279.4
  Top Layer w20: P8.8 R42.2
NetP8_9: P8.9 R41.2 | length 363.4
  Top Layer w20: R41.2 2031.97,374.41 2038.7,367.68 2038.7,365.71 2230,174.41 P8.9
NetP8_10: P8.10 R40.2 | length 515.7
  Top Layer w20: R40.2 1850.59,374.41 1925,300 P8.10
NetP8_11: P8.11 R39.2 | length 718.7
  Top Layer w20: R39.2 1431.97,374.41 1536.38,270 1860,270 2030,100 P8.11
NetP8_12: P8.12 R38.2 | length 918.7
  Top Layer w20: R38.2 1131.97,374.41 1271.38,235 1795,235 1930,100 P8.12
NetP8_13: P8.13 R37.2 | length 1115.7
  Top Layer w20: R37.2 831.97,374.41 1006.38,200 1725,200 P8.13
NetP8_14: P8.14 R36.2 | length 1315.7
  Top Layer w20: R36.2 531.97,374.41 741.38,165 1660,165 P8.14
NetP8_15: P8.15 R35.2 | length 1515.7
  Top Layer w20: R35.2 231.97,374.41 511.38,95 P8.15
NetR2_1: 
NetR5_1: 
NetR6_1: 
NetR9_1: 
NetR9_2: 
NetR10_1: 
NetR10_2: 
NetR11_1: 
NetR11_2: 
NetR12_1: 
NetR12_2: 
NetR13_1: 
NetR13_2: 
NetR14_1: 
NetR14_2: 
NetR15_2: 
NetR16_2: 
NetR17_1: 
NetR18_1: 
NetR19_1: 
NetR20_1: 
NetR20_2: 
NetR21_1: 
NetR21_2: 
NetR22_1: 
NetR22_2: 
NetR23_1: 
NetR23_2: 
NetR24_1: 
NetR24_2: 
NetR25_1: 
NetR25_2: 
NetR26_1: 
NetR26_2: 
NetR27_2: 
NetR28_1: 
NetR33_2: 
NetR34_2: 